# Altium PCB VESC_BMS.PcbDoc (part 2 of 4)
Units mm, origin at the board's own origin, x right, y up, seen from the top; angles counter-clockwise.
Board outline 100 x 75 mm, 4 copper layers (L1, L2, L3, L4), stack 1.446 mm thick; 263 components, 195 nets, 808 pads, 1031 vias.
Unrouted connection lines stored in the file: 1.
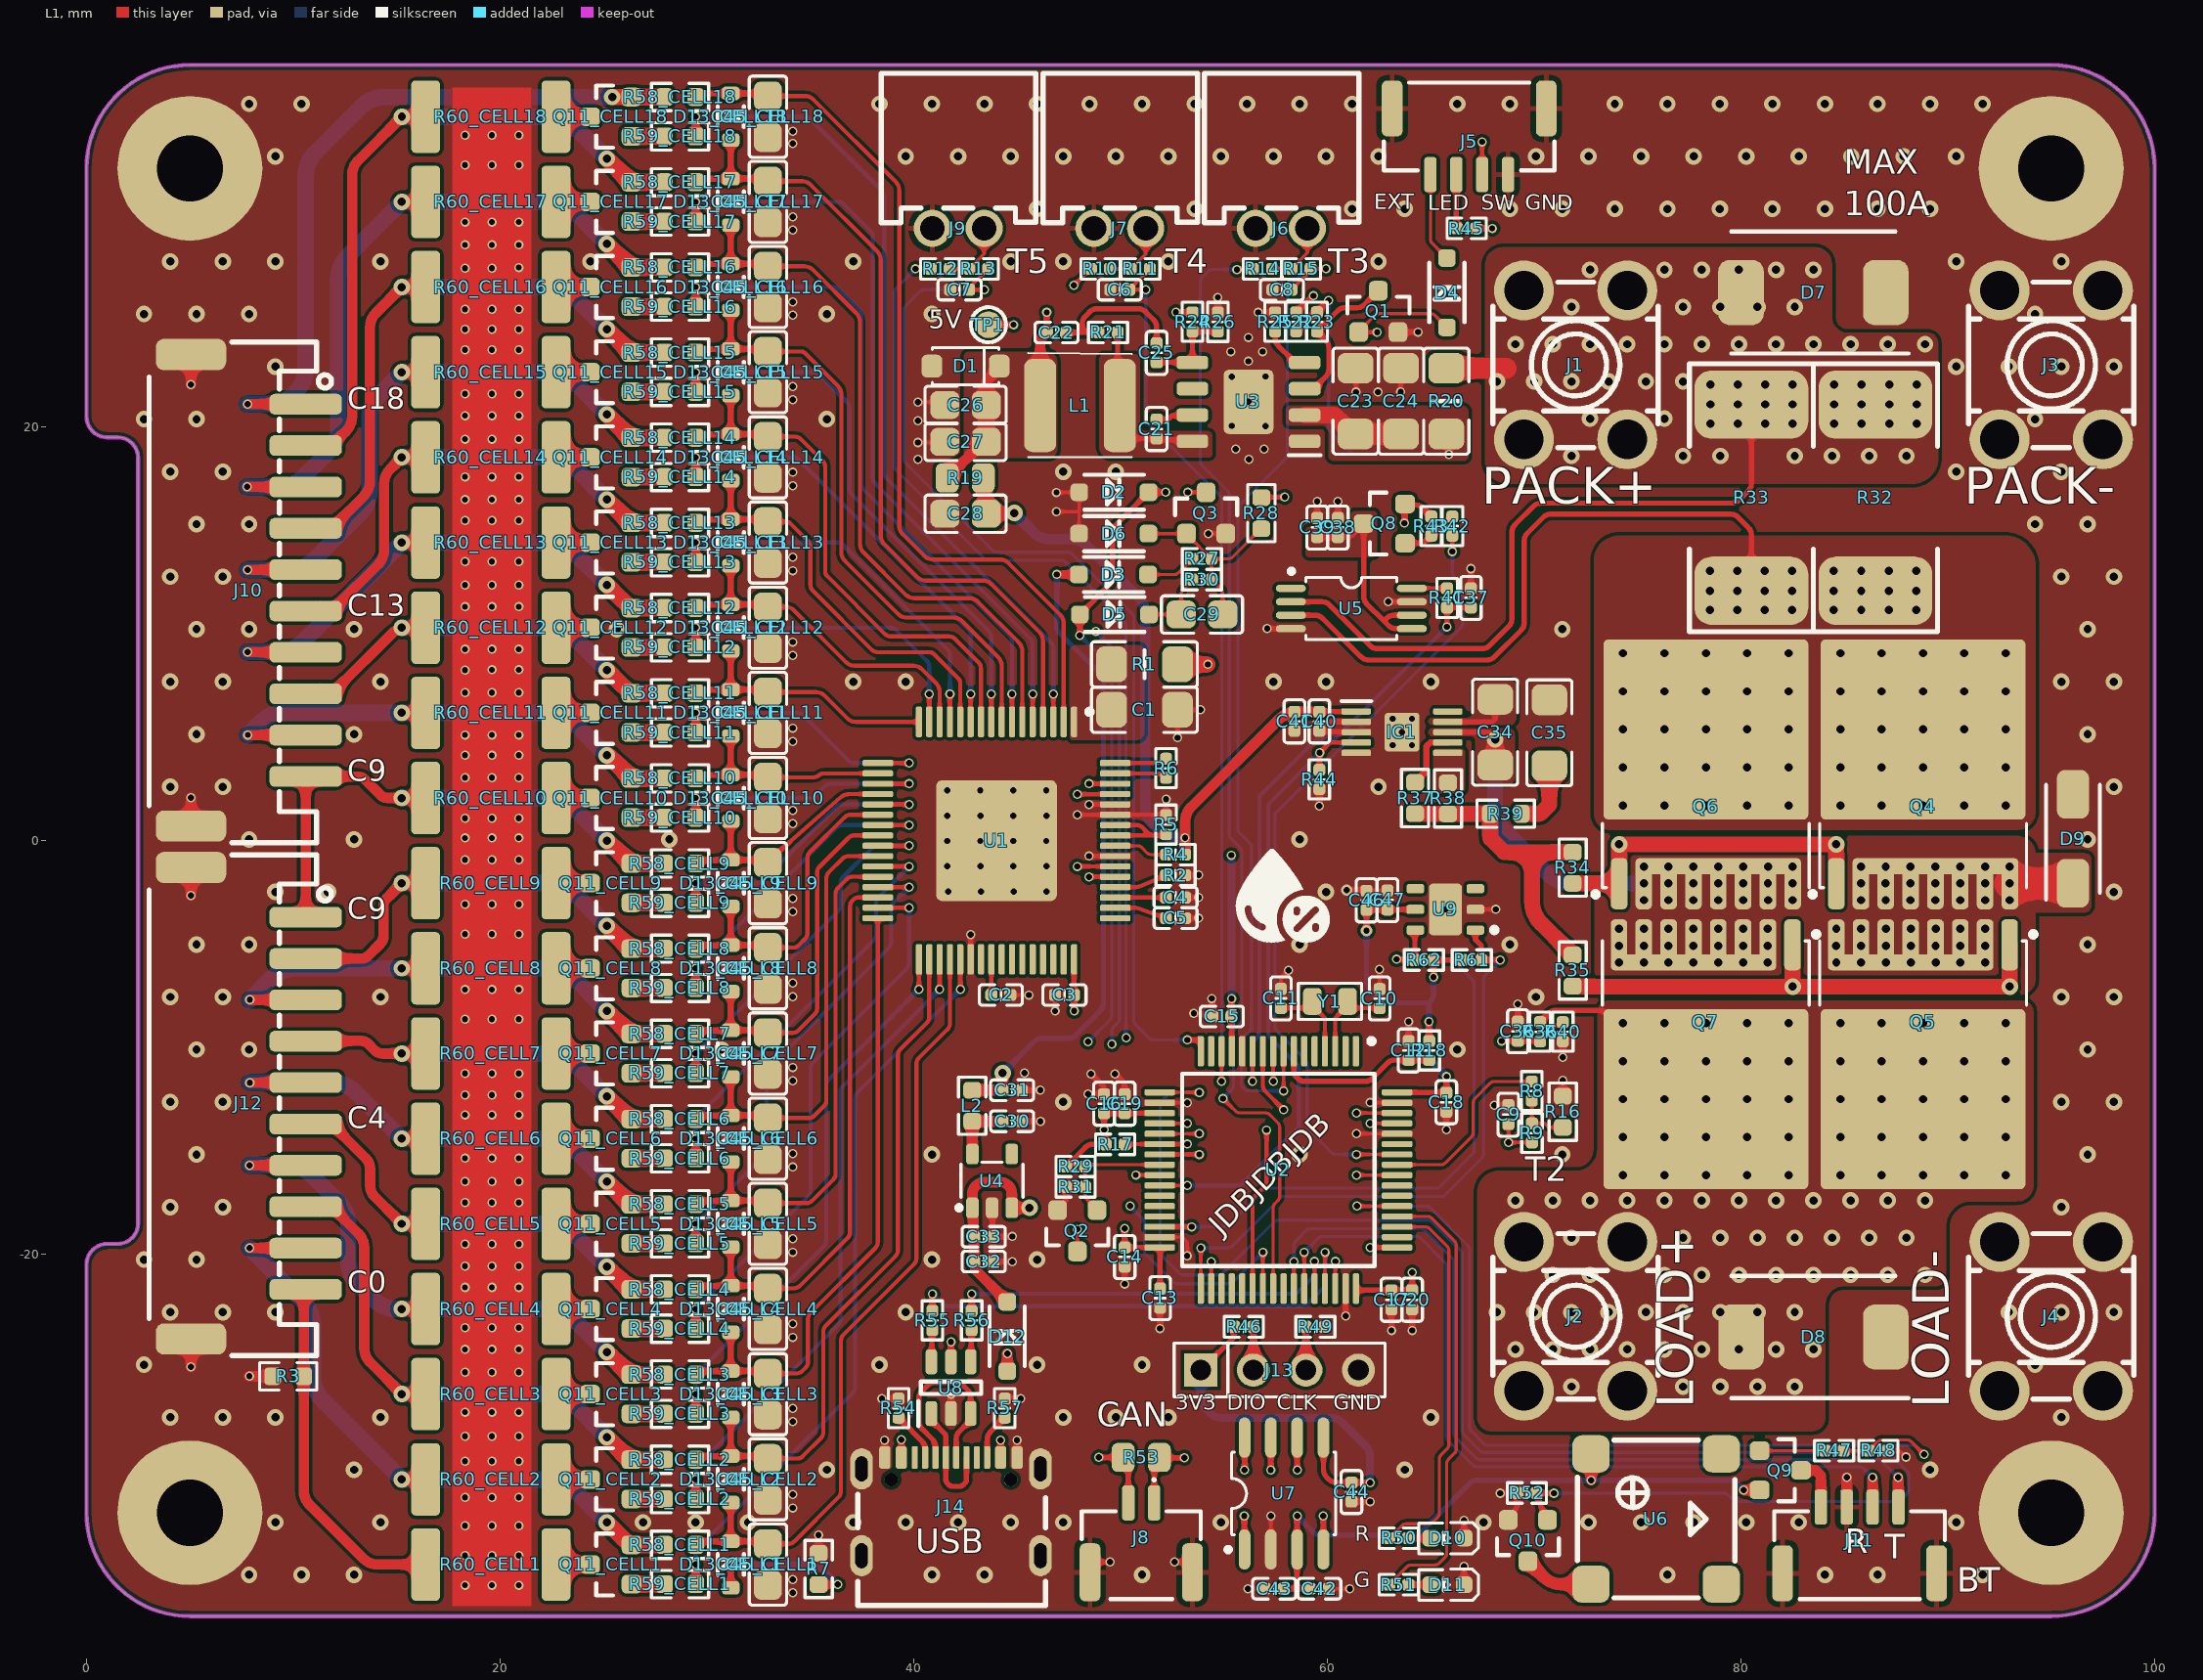
[diagram p0: L1 view]

## Part data (continued)
U3: "Integrated Circuit", Manufacturer_Name="Texas Instruments", Mouser Part Number=595-LM5164DDAR, Arrow Part Number=LM5164DDAR, Arrow Price/Stock=https://www.arrow.com/en/products/lm5164ddar/texas-instruments?utm_currency=USD&region=nac, Datasheet Link=http://www.ti.com/lit/ds/symlink/lm5164.pdf, Height=1.7mm, Manufacturer_Part_Number=LM5164DDAR, Mouser Price/Stock=https://www.mouser.co.uk/ProductDetail/Texas-Instruments/LM5164DDAR?qs=PqoDHHvF64%2F0M%252BK9zcb2mw%3D%3D
U6: library part HYG-7525A, Current Consumption=90mA, JLCPCB Part Class=扩展库, LCSC Part Name=贴片无源蜂鸣器, Manufacturer=HYDZ(华宇), Add into BOM=yes, Convert to PCB=yes, Datasheet=https://atta.szlcsc.com/upload/public/pdf/source/20230825/78098EC44B170663F3151CF5366FAD5D.pdf, Device=HYG-7525A, Manufacturer Part=HYG-7525A, Sound Pressure Level(SPL)=85dB, Supplier=LCSC, Supplier Footprint=SMD,7.5x7.5mm, Supplier Part=C7544812, Symbol=HYG-7525A
U8: "Integrated Circuit", Manufacturer_Name=STMicroelectronics, Mouser Part Number=511-USBLC6-2SC6, Arrow Part Number=USBLC6-2SC6, Arrow Price/Stock=https://www.arrow.com/en/products/usblc6-2sc6/stmicroelectronics?utm_currency=USD&region=europe, Datasheet Link=http://www.st.com/st-web-ui/static/active/en/resource/technical/document/datasheet/CD00050750.pdf, Height=1.45mm, Manufacturer_Part_Number=USBLC6-2SC6, Mouser Price/Stock=https://www.mouser.co.uk/ProductDetail/STMicroelectronics/USBLC6-2SC6?qs=po45yt2pPpu%2FhNIlwQdTlg%3D%3D
U9: "Integrated Circuit", Manufacturer_Name="Texas Instruments", Mouser Part Number=595-HDC1080DMBR, Arrow Part Number=HDC1080DMBR, Arrow Price/Stock=https://www.arrow.com/en/products/hdc1080dmbr/texas-instruments?region=nac, Datasheet Link=http://www.ti.com/lit/gpn/HDC1080, Height=0.8mm, Manufacturer_Part_Number=HDC1080DMBR, Mouser Price/Stock=https://www.mouser.co.uk/ProductDetail/Texas-Instruments/HDC1080DMBR?qs=8%2FmU9qzJpL9OuhPLRSO9Vg%3D%3D
Y1: "Crystal or Oscillator", Arrow Part Number=ABS05-32.768KHZ-9-T, Manufacturer_Name=ABRACON, Mouser Part Number=815-ABS05-32.768K9T, Arrow Price/Stock=https://www.arrow.com/en/products/abs05-32.768khz-9-t/abracon?region=nac, Datasheet Link=https://abracon.com/Resonators/ABS05.pdf, Height=0.5mm, Manufacturer_Part_Number=ABS05-32.768KHZ-9-T, Mouser Price/Stock=https://www.mouser.co.uk/ProductDetail/ABRACON/ABS05-32.768KHZ-9-T?qs=Pyu0ZBy%2FIJbsNYnIET1z3A%3D%3D

## Free pads (board coordinates)
  round 7 hole 3.2: 0(5,-32.5) 0(5,32.5) 0(95,-32.5) 0(95,32.5)

## Via types
v1: diameter 0.8, hole 0.4, L1 to L4, tented both sides, 496 vias
v2: diameter 0.45, hole 0.3, L1 to L4, tented both sides, 449 vias
v3: diameter 0.6, hole 0.4, L1 to L4, tented both sides, 84 vias
v4: diameter 0.55, hole 0.3, L1 to L4, tented both sides, 2 vias

## Nets (pads, with @x,y where several pads share a name; then routed paths per layer and width w, separated by ;. In a path a pad name is that pad's centre, name@x,y a point inside that pad or via, vN(x,y) a via of type N, cw(c..) or ccw(c..) an arc to the next point about the centre after c; other vN are vias at no path point)
3V3: C13.2 C14.2 C15.2 C16.2 C17.2 C18.2 C19.2 C20.2 C31.1 C44.2 C46.2 C47.2 D3.1 J13.1 L2.2 Q8.S R17.2 R18.2 R29.2 R43.2 R46.1 R61.2 R62.2 U2.13 U2.19 U2.32 U2.48 U2.64 U7.5 U9.5 | length 183.5
  L1 w0.254: R29.2@47.366,-15.76 48.292,-14.834 cw(c48.651,-15.194) 48.651,-14.686 R17.2@49.28,-14.686 ; v2(49.2,-13.98) C16.2@49.2,-13.179 C19.2@50.2,-13.179 50.339,-13.176 51.283,-13.176 U2.19@51.893,-13.173 ; v2@49.2,-13.981 cw(c48.73,-14.171) 49.238,-14.171 49.238,-14.546 R17.2@49.238,-14.643 ; v2(50.2,-18.747) C14.2@50.2,-19.673 U2.32@51.893,-19.673 51.91,-19.696 C13.2@51.91,-21.661 ; J13.1@53.88,-25.6 55.474,-24.006 55.474,-23.557 R46.1@55.511,-23.52 ; v2(55.369,-7.646) 55.364,-7.651 55.364,-8.496 C15.2@55.36,-8.5 55.371,-8.639 55.371,-9.574 U2.13@55.381,-10.185 ; U7.5@59.808,-28.865 59.808,-30.408 ccw(c60.316,-30.408) 59.955,-30.766 60.079,-30.889 ccw(c60.437,-30.529) 60.437,-31.037 C44.2@61.166,-31.037 v2(62.061,-31.037) ; U2.48@61.381,-21.661 61.404,-21.74 C17.2@63.1,-21.74 C20.2@64.1,-21.74 64.103,-21.601 64.103,-20.939 cw(c64.611,-20.941) v2(64.107,-20.883) ; v4(61.891,-4.349) C46.2@61.891,-3.347 61.896,-3.342 62.9,-3.342 C47.2@62.904,-3.338 62.91,-3.332 64.251,-3.332 U9.5@64.256,-3.327 ; U2.64@63.372,-12.175 C18.2@65.767,-12.175 ; v2(63.728,15.35) Q8.S@63.728,16.254 ; Q8.S@63.754,16.28 64.004,16.23 64.251,16.23 cw(c64.251,15.722) 64.609,16.082 64.886,15.805 R43.2@65.026,15.665 ; R18.2@64.913,-9.677 v2(64.913,-8.759) ; v2(65.131,-6.594) R62.2@65.131,-5.773 R61.2@66.526,-5.773 ; C18.2@65.767,-12.174 v2(65.767,-11.411)
  L1 w0.381: v2(46.92,12.867) D3.1@47.981,12.866
  L1 w0.508: L2.2@42.825,-12.067 C31.1@44.297,-12.067 v1(44.297,-11.237)
  L3 w0.254: v2(55.352,-0.705) 52.398,-0.705 cw(c52.398,-0.197) 52.039,-0.557 51.665,-0.182 cw(c52.026,0.175) 51.518,0.175 51.518,7.805 cw(c52.026,7.805) 51.666,8.163 56.599,13.096 cw(c56.957,12.736) 56.957,13.244 61.412,13.244 ccw(c61.412,13.752) 61.77,13.392 v2(63.728,15.35)
  L3 w0.508: v1(44.297,-11.237) 44.297,-12.428 ccw(c45.313,-12.428) 44.592,-13.144 47.314,-15.866 ; v2(49.2,-13.98) 47.314,-15.866 ; v2@50.195,-18.747 47.314,-15.866 ; v2@50.213,-18.76 53.88,-22.427 ; J13.1@53.88,-25.6 53.88,-22.427 ; v2(55.369,-7.646) 55.371,-7.648 cw(c54.604,-8.315) 55.62,-8.315 55.62,-15.055 ; v2(64.107,-20.883) 64.107,-19.929 ccw(c63.091,-19.93) 63.809,-19.211 63.568,-18.97 ccw(c62.85,-19.689) 62.85,-18.673 55.62,-18.673 ; v2(64.913,-8.759) 62.78,-10.893 cw(c62.062,-10.174) 62.062,-11.19 61.715,-11.19 ccw(c61.715,-12.206) 60.998,-11.486 57.726,-14.759 cw(c57.008,-14.039) 57.008,-15.055 55.62,-15.055 ; 53.88,-22.427 55.323,-20.984 ccw(c54.604,-20.266) 55.62,-20.266 55.62,-18.673 ; 55.62,-18.673 55.62,-15.055
  L4 w0.254: v1(44.297,-11.237) 45.824,-9.709 cw(c46.183,-10.069) 46.183,-9.561 47.474,-9.561 ccw(c47.474,-9.053) 47.833,-9.413 49.025,-8.222 ccw(c48.664,-7.863) 49.172,-7.863 49.172,7.702 ccw(c48.664,7.702) 49.024,8.062 47.068,10.018 cw(c47.428,10.376) 46.92,10.376 v2(46.92,12.867) ; v4(61.891,-4.349) 61.891,-6.754 ccw(c62.399,-6.754) 62.038,-7.112 62.621,-7.694 ccw(c62.979,-7.334) 62.979,-7.842 64.913,-7.842 v2(64.913,-8.759) ; 64.913,-7.833 64.983,-7.763 ccw(c64.623,-7.405) 65.131,-7.405 v2(65.131,-6.594)
  L4 w0.381: J13.1@53.88,-25.6 53.88,-26.907 ccw(c54.642,-26.907) 54.102,-27.444 54.343,-27.685 ccw(c54.88,-27.145) 54.878,-27.907 60.167,-27.907 cw(c60.167,-28.669) 60.706,-28.13 61.838,-29.262 cw(c61.299,-29.801) 62.061,-29.801 v2(62.061,-31.037) ; v2(55.352,-0.705) 55.364,-0.717 55.364,-7.641 v2(55.369,-7.646) ; v2(64.913,-8.759) 64.913,-10.242 ccw(c65.675,-10.242) 65.135,-10.779 ; 65.135,-10.779 v2(65.767,-11.411)
5V: C3.1 C28.2 C32.1 C33.1 C40.1 C41.2 C42.2 C43.2 D12.2 IC1.1 Q9.S R4.1 R19.1 TP1.1 U1.48 U4.1 U4.3 U6.1 U7.3 | length 163.3
  L1 w0.254: TP1.1@43.612,24.943 v2(44.825,24.943) ; U1.48@47.75,-5.738 C3.1@47.75,-7.464 47.753,-7.467 47.753,-8.232 v2(47.756,-8.235) ; C43.2@57.89,-36.172 58.524,-36.172 ; U7.3@58.524,-34.289 58.524,-36.172 ; U7.3@58.538,-34.275 v2(58.538,-32.66) ; C42.2@59.152,-36.172 58.524,-36.172 ; C40.1@59.75,6.235 IC1.1@61.373,6.235
  L1 w0.508: R19.1@43.364,17.535 43.435,17.463 43.435,15.878 C28.2@43.507,15.806 43.522,15.821 44.848,15.821 v1(44.864,15.837) ; D12.2@44.52,-22.297 44.511,-22.297 44.349,-22.135 44.349,-22.126 42.962,-20.738 42.962,-20.39 C32.1@42.926,-20.354 C33.1@42.926,-19.154 42.881,-19.015 42.881,-18.106 U4.1@42.836,-17.755 42.836,-17.067 cw(c43.344,-17.067) 42.984,-16.709 43.022,-16.671 cw(c43.38,-17.031) 43.38,-16.523 44.217,-16.523 cw(c44.217,-17.031) 44.576,-16.672 44.588,-16.683 cw(c44.228,-17.042) 44.736,-17.042 44.736,-17.405 U4.3@44.736,-17.755 v1(45.6,-17.755) ; R4.1@53.12,-0.677 53.12,-0.641 53.12,0.912 cw(c54.136,0.912) 53.417,1.629 57.683,5.895 cw(c58.399,5.175) 58.371,6.191 C41.2@58.407,6.227 C40.1@59.611,6.227 ; v2(72.75,-30.928) U6.1@72.75,-29.65 U6.1@72.75,-29.55 ; v2(80.135,-31.396) Q9.S@80.903,-31.396
  L3 w0.254: v2(44.825,24.943) v2(44.825,24.943) cw(c44.336,24.804) 44.844,24.804 44.844,15.856 v1(44.864,15.837) ; v1(45.6,-17.755) 47.904,-20.06 cw(c47.545,-20.419) 48.053,-20.418 48.053,-30.625 ccw(c48.561,-30.624) 48.203,-30.984 49.128,-31.909 ccw(c49.486,-31.549) 49.486,-32.057 57.724,-32.057 cw(c57.724,-32.565) 58.083,-32.205 v2(58.538,-32.66)
  L3 w0.508: v1(44.864,15.837) 38.583,9.556 ccw(c39.302,8.839) 38.286,8.839 38.286,-10.021 ccw(c39.302,-10.021) 38.581,-10.737 42.12,-14.275 ; v1(45.6,-17.755) 42.12,-14.275 ; v2(47.756,-8.235) 47.095,-8.896 cw(c46.378,-8.176) 46.378,-9.192 44.1,-9.192 ccw(c44.1,-10.208) 43.382,-9.489 42.417,-10.455 ccw(c43.136,-11.172) 42.12,-11.172 42.12,-14.275
  L4 w0.254: v2(58.538,-32.66) 59.305,-33.427 ccw(c59.663,-33.067) 59.663,-33.575 64.17,-33.575 ccw(c64.17,-33.067) 64.529,-33.427 66.88,-31.076 cw(c67.238,-31.436) 67.238,-30.928 v2(72.75,-30.928) 79.456,-30.928 cw(c79.456,-31.436) 79.815,-31.076 v2(80.135,-31.396)
  L4 w0.508: v1(44.864,15.837) 45.823,14.877 ccw(c46.54,15.598) 46.54,14.582 47.616,14.582 cw(c47.616,13.566) 48.336,14.282 50.898,11.721 cw(c50.178,11.003) 51.194,11.003 51.194,1.565 ccw(c52.21,1.565) 51.491,0.847 51.909,0.429 ccw(c52.627,1.149) 52.627,0.133 v2(53.12,0.133)